# Altium PCB WorldClock.PcbDoc (part 12 of 13)
Units mil, origin at the board's own origin, x right, y up, seen from the top; angles counter-clockwise.
Board outline 3700 x 3850 mil, 2 copper layers (Top Layer, Bottom Layer); 227 components, 134 nets, 1324 pads, 248 vias.
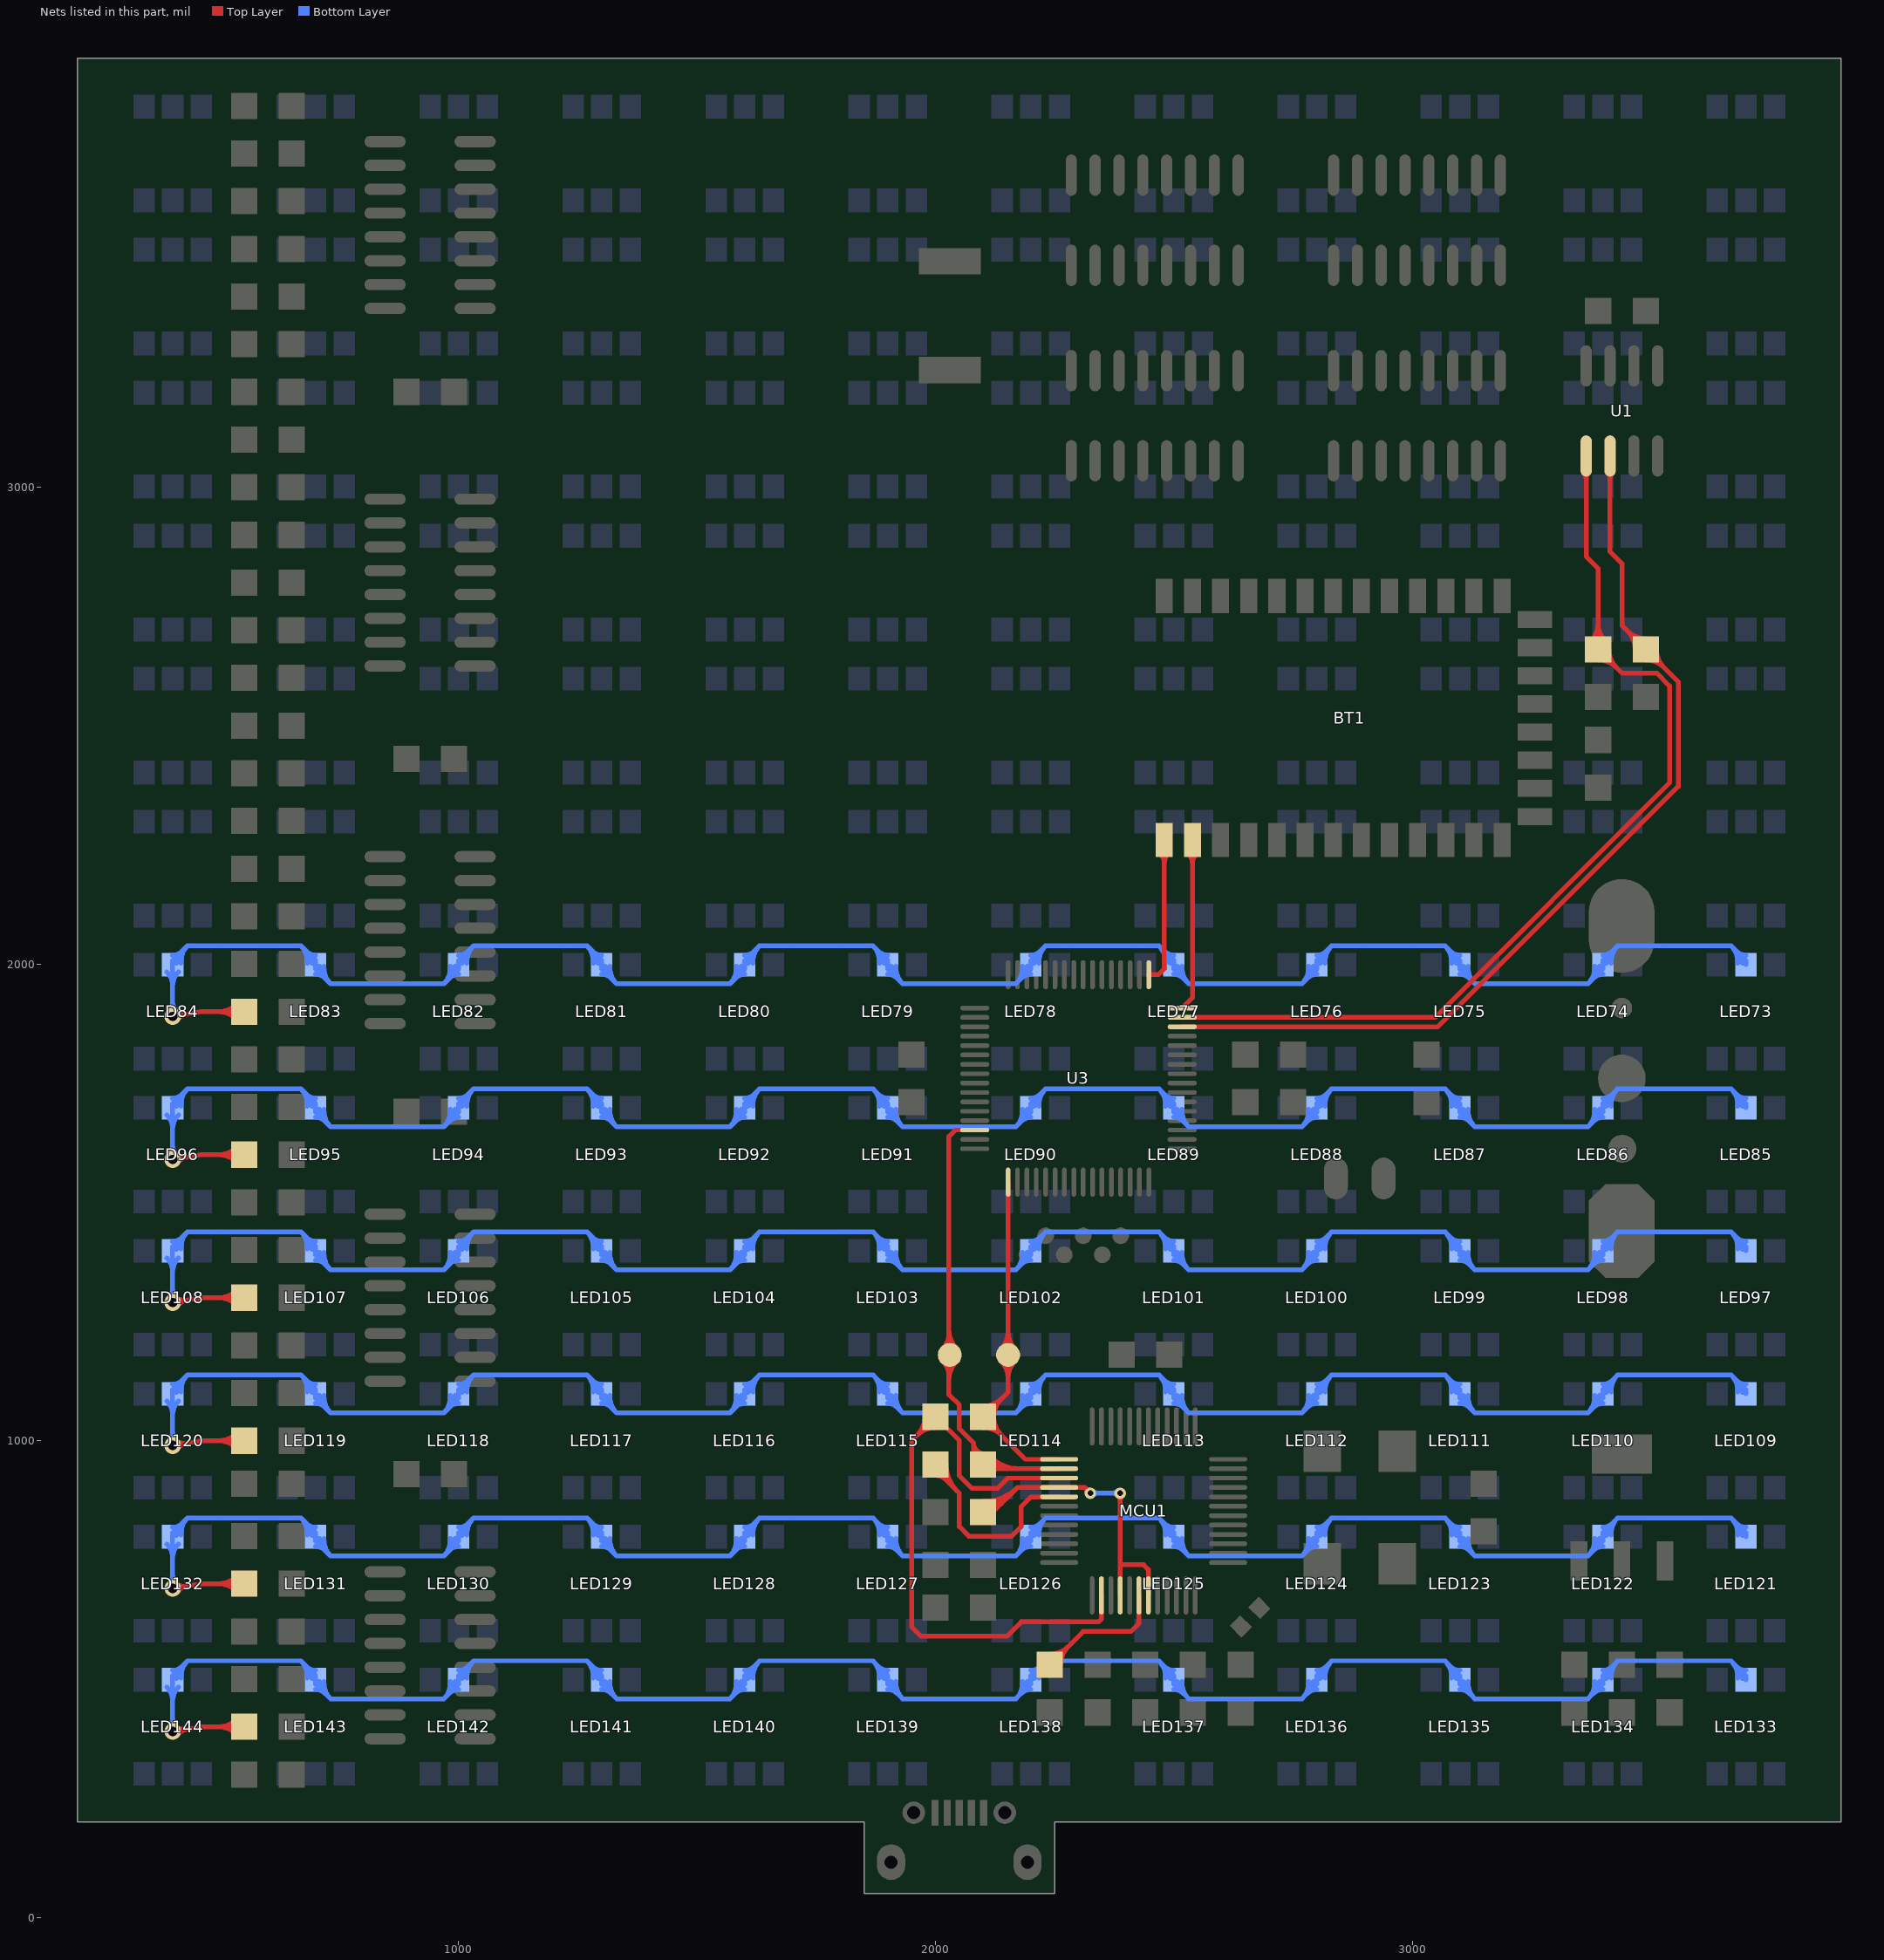
[diagram p12: the nets of this part, all layers, seen from the top]

## Via types
v1: diameter 35, hole 20, Top Layer to Bottom Layer, tented both sides, 213 vias
v2: diameter 24, hole 12, Top Layer to Bottom Layer, tented both sides, 35 vias

## Nets (pads, with @x,y where several pads share a name; then routed paths per layer and width w, separated by ;. In a path a pad name is that pad's centre, name@x,y a point inside that pad or via, vN(x,y) a via of type N, cw(c..) or ccw(c..) an arc to the next point about the centre after c; other vN are vias at no path point) (continued)
R7: LED73.2 LED74.2 LED75.2 LED76.2 LED77.2 LED78.2 LED79.2 LED80.2 LED81.2 LED82.2 LED83.2 LED84.2 R29.1 | length 6201.5
  Top Layer w10: v1(400,1890) 460,1900 R29.1@550,1900 ; v1@407.27,1900.17 ccw(c424.81,1924.73) 429.77,1894.96 ccw(c434.73,1865.19) v1@410.17,1882.73 ; R29.1@534.09,1884.09 ccw(c495.68,1845.68) 495.68,1900 ccw(c495.68,1954.32) R29.1@534.09,1915.91 ; R29.1@541.16,1891.16 ccw(c519.82,1869.82) 519.82,1900 ccw(c519.82,1930.18) R29.1@541.16,1908.84
  Bottom Layer w10: LED84.2@387.63,1983.55 cw(c357.75,1953.68) 400,1953.68 cw(c442.25,1953.68) LED84.2@412.37,1983.55 ; v1@391.16,1898.84 ccw(c369.82,1920.18) 400,1920.18 ccw(c430.18,1920.18) v1@408.84,1898.84 ; v1(400,1890) LED84.2@400,1998.43 400,2007.14 431.29,2038.43 668.71,2038.43 700,2007.14 LED83.2@700,1998.43 700,1989.71 731.29,1958.43 ; LED84.2@400,2018.43 ccw(c400,2045.67) 419.27,2026.41 ; LED84.2@407.49,2001.38 cw(c435.23,2003.06) LED84.2@415.58,2022.71 ; LED84.2@417.47,2001.98 cw(c464.85,2004.86) 431.28,2038.42 ; 668.72,2038.42 cw(c635.15,2004.86) LED83.2@682.53,2001.98 ; 680.73,2026.41 ccw(c700,2045.67) LED83.2@700,2018.43 ; LED83.2@684.42,2022.71 cw(c664.77,2003.06) LED83.2@692.51,2001.38 ; LED83.2@700,1978.43 cw(c700,1951.18) 719.27,1970.44 ; LED83.2@707.49,1995.47 ccw(c735.23,1993.79) LED83.2@715.58,1974.14 ; LED83.2@717.47,1994.87 ccw(c764.85,1991.99) 731.28,1958.43 ; 980.73,1970.44 cw(c1000,1951.18) LED82.2@1000,1978.43 ; LED82.2@982.53,1994.87 cw(c935.15,1991.99) 968.72,1958.43 ; LED82.2@984.42,1974.14 ccw(c964.77,1993.79) LED82.2@992.51,1995.47 ; LED82.2@1000,2018.43 ccw(c1000,2045.67) 1019.27,2026.41 ; LED82.2@1007.49,2001.38 cw(c1035.23,2003.06) LED82.2@1015.58,2022.71 ; LED82.2@1017.47,2001.98 cw(c1064.85,2004.86) 1031.28,2038.42 ; 1268.72,2038.42 cw(c1235.15,2004.86) LED81.2@1282.53,2001.98 ; 1280.73,2026.41 ccw(c1300,2045.67) LED81.2@1300,2018.43 ; LED81.2@1284.42,2022.71 cw(c1264.77,2003.06) LED81.2@1292.51,2001.38 ; LED81.2@1300,1978.43 cw(c1300,1951.18) 1319.27,1970.44 ; LED81.2@1307.49,1995.47 ccw(c1335.23,1993.79) LED81.2@1315.58,1974.14 ; LED81.2@1317.47,1994.87 ccw(c1364.85,1991.99) 1331.28,1958.43 ; 1580.73,1970.44 cw(c1600,1951.18) LED80.2@1600,1978.43 ; LED80.2@1582.53,1994.87 cw(c1535.15,1991.99) 1568.72,1958.43 ; LED80.2@1584.42,1974.14 ccw(c1564.77,1993.79) LED80.2@1592.51,1995.47 ; LED80.2@1600,2018.43 ccw(c1600,2045.67) 1619.27,2026.41 ; LED80.2@1607.49,2001.38 cw(c1635.23,2003.06) LED80.2@1615.58,2022.71 ; LED80.2@1617.47,2001.98 cw(c1664.85,2004.86) 1631.28,2038.42 ; 1868.72,2038.42 cw(c1835.15,2004.86) LED79.2@1882.53,2001.98 ; 1880.73,2026.41 ccw(c1900,2045.67) LED79.2@1900,2018.43 ; LED79.2@1884.42,2022.71 cw(c1864.77,2003.06) LED79.2@1892.51,2001.38 ; LED79.2@1900,1978.43 cw(c1900,1951.18) 1919.27,1970.44 ; LED79.2@1907.49,1995.47 ccw(c1935.23,1993.79) LED79.2@1915.58,1974.14 ; LED79.2@1917.47,1994.87 ccw(c1964.85,1991.99) 1931.28,1958.43 ; 2180.73,1970.44 cw(c2200,1951.18) LED78.2@2200,1978.43 ; LED78.2@2182.53,1994.87 cw(c2135.15,1991.99) 2168.72,1958.43 ; LED78.2@2184.42,1974.14 ccw(c2164.77,1993.79) LED78.2@2192.51,1995.47 ; LED78.2@2200,2018.43 ccw(c2200,2045.67) 2219.27,2026.41 ; LED78.2@2207.49,2001.38 cw(c2235.23,2003.06) LED78.2@2215.58,2022.71 ; LED78.2@2217.47,2001.98 cw(c2264.85,2004.86) 2231.28,2038.42 ; 2468.72,2038.42 cw(c2435.15,2004.86) LED77.2@2482.53,2001.98 ; 2480.73,2026.41 ccw(c2500,2045.67) LED77.2@2500,2018.43 ; LED77.2@2484.42,2022.71 cw(c2464.77,2003.06) LED77.2@2492.51,2001.38 ; LED77.2@2500,1978.43 cw(c2500,1951.18) 2519.27,1970.44 ; LED77.2@2507.49,1995.47 ccw(c2535.23,1993.79) LED77.2@2515.58,1974.14 ; LED77.2@2517.47,1994.87 ccw(c2564.85,1991.99) 2531.28,1958.43 ; 2780.73,1970.44 cw(c2800,1951.18) LED76.2@2800,1978.43 ; LED76.2@2782.53,1994.87 cw(c2735.15,1991.99) 2768.72,1958.43 ; LED76.2@2784.42,1974.14 ccw(c2764.77,1993.79) LED76.2@2792.51,1995.47 ; LED76.2@2800,2018.43 ccw(c2800,2045.67) 2819.27,2026.41 ; LED76.2@2807.49,2001.38 cw(c2835.23,2003.06) LED76.2@2815.58,2022.71 ; LED76.2@2817.47,2001.98 cw(c2864.85,2004.86) 2831.28,2038.42 ; 3068.72,2038.42 cw(c3035.15,2004.86) LED75.2@3082.53,2001.98 ; 3080.73,2026.41 ccw(c3100,2045.67) LED75.2@3100,2018.43 ; LED75.2@3084.42,2022.71 cw(c3064.77,2003.06) LED75.2@3092.51,2001.38 ; LED75.2@3100,1978.43 cw(c3100,1951.18) 3119.27,1970.44 ; LED75.2@3107.49,1995.47 ccw(c3135.23,1993.79) LED75.2@3115.58,1974.14 ; LED75.2@3117.47,1994.87 ccw(c3164.85,1991.99) 3131.28,1958.43 ; 3380.73,1970.44 cw(c3400,1951.18) LED74.2@3400,1978.43 ; LED74.2@3382.53,1994.87 cw(c3335.15,1991.99) 3368.72,1958.43 ; LED74.2@3384.42,1974.14 ccw(c3364.77,1993.79) LED74.2@3392.51,1995.47 ; LED74.2@3400,2018.43 ccw(c3400,2045.67) 3419.27,2026.41 ; LED74.2@3407.49,2001.38 cw(c3435.23,2003.06) LED74.2@3415.58,2022.71 ; LED74.2@3417.47,2001.98 cw(c3464.85,2004.86) 3431.28,2038.42 ; 3668.72,2038.42 cw(c3635.15,2004.86) LED73.2@3682.53,2001.98 ; 3680.73,2026.41 ccw(c3700,2045.67) LED73.2@3700,2018.43 ; LED73.2@3684.42,2022.71 cw(c3664.77,2003.06) LED73.2@3692.51,2001.38 ; LED73.2@3700,1998.43 3700,2007.14 3668.71,2038.43 3431.29,2038.43 3400,2007.14 LED74.2@3400,1998.43 3400,1989.71 3368.71,1958.43 ; 731.29,1958.43 968.71,1958.43 ; 968.71,1958.43 1000,1989.71 LED82.2@1000,1998.43 1000,2007.14 1031.29,2038.43 1268.71,2038.43 1300,2007.14 LED81.2@1300,1998.43 1300,1989.71 1331.29,1958.43 ; 1331.29,1958.43 1568.71,1958.43 ; 1568.71,1958.43 1600,1989.71 LED80.2@1600,1998.43 1600,2007.14 1631.29,2038.43 1868.71,2038.43 1900,2007.14 LED79.2@1900,1998.43 1900,1989.71 1931.29,1958.43 ; 1931.29,1958.43 2168.71,1958.43 ; 2168.71,1958.43 2200,1989.71 LED78.2@2200,1998.43 2200,2007.14 2231.29,2038.43 2468.71,2038.43 2500,2007.14 LED77.2@2500,1998.43 2500,1989.71 2531.29,1958.43 ; 2531.29,1958.43 2768.71,1958.43 ; 2768.71,1958.43 2800,1989.71 LED76.2@2800,1998.43 2800,2007.14 2831.29,2038.43 3068.71,2038.43 3100,2007.14 LED75.2@3100,1998.43 3100,1989.71 3131.29,1958.43 ; 3131.29,1958.43 3368.71,1958.43
R8: LED85.2 LED86.2 LED87.2 LED88.2 LED89.2 LED90.2 LED91.2 LED92.2 LED93.2 LED94.2 LED95.2 LED96.2 R32.1 | length 6201.5
  Top Layer w10: v1(400,1590) 460,1600 R32.1@550,1600 ; v1@407.27,1600.17 ccw(c424.81,1624.73) 429.77,1594.96 ccw(c434.73,1565.19) v1@410.17,1582.73 ; R32.1@534.09,1584.09 ccw(c495.68,1545.68) 495.68,1600 ccw(c495.68,1654.32) R32.1@534.09,1615.91 ; R32.1@541.16,1591.16 ccw(c519.82,1569.82) 519.82,1600 ccw(c519.82,1630.18) R32.1@541.16,1608.84
  Bottom Layer w10: LED96.2@387.63,1683.55 cw(c357.75,1653.68) 400,1653.68 cw(c442.25,1653.68) LED96.2@412.37,1683.55 ; v1@391.16,1598.84 ccw(c369.82,1620.18) 400,1620.18 ccw(c430.18,1620.18) v1@408.84,1598.84 ; v1(400,1590) LED96.2@400,1698.43 400,1707.14 431.29,1738.43 668.71,1738.43 700,1707.14 LED95.2@700,1698.43 700,1689.71 731.29,1658.43 ; LED96.2@400,1718.43 ccw(c400,1745.67) 419.27,1726.41 ; LED96.2@407.49,1701.38 cw(c435.23,1703.06) LED96.2@415.58,1722.71 ; LED96.2@417.47,1701.98 cw(c464.85,1704.86) 431.28,1738.42 ; 668.72,1738.42 cw(c635.15,1704.86) LED95.2@682.53,1701.98 ; 680.73,1726.41 ccw(c700,1745.67) LED95.2@700,1718.43 ; LED95.2@684.42,1722.71 cw(c664.77,1703.06) LED95.2@692.51,1701.38 ; LED95.2@700,1678.43 cw(c700,1651.18) 719.27,1670.44 ; LED95.2@707.49,1695.47 ccw(c735.23,1693.79) LED95.2@715.58,1674.14 ; LED95.2@717.47,1694.87 ccw(c764.85,1691.99) 731.28,1658.43 ; 980.73,1670.44 cw(c1000,1651.18) LED94.2@1000,1678.43 ; LED94.2@982.53,1694.87 cw(c935.15,1691.99) 968.72,1658.43 ; LED94.2@984.42,1674.14 ccw(c964.77,1693.79) LED94.2@992.51,1695.47 ; LED94.2@1000,1718.43 ccw(c1000,1745.67) 1019.27,1726.41 ; LED94.2@1007.49,1701.38 cw(c1035.23,1703.06) LED94.2@1015.58,1722.71 ; LED94.2@1017.47,1701.98 cw(c1064.85,1704.86) 1031.28,1738.42 ; 1268.72,1738.42 cw(c1235.15,1704.86) LED93.2@1282.53,1701.98 ; 1280.73,1726.41 ccw(c1300,1745.67) LED93.2@1300,1718.43 ; LED93.2@1284.42,1722.71 cw(c1264.77,1703.06) LED93.2@1292.51,1701.38 ; LED93.2@1300,1678.43 cw(c1300,1651.18) 1319.27,1670.44 ; LED93.2@1307.49,1695.47 ccw(c1335.23,1693.79) LED93.2@1315.58,1674.14 ; LED93.2@1317.47,1694.87 ccw(c1364.85,1691.99) 1331.28,1658.43 ; 1580.73,1670.44 cw(c1600,1651.18) LED92.2@1600,1678.43 ; LED92.2@1582.53,1694.87 cw(c1535.15,1691.99) 1568.72,1658.43 ; LED92.2@1584.42,1674.14 ccw(c1564.77,1693.79) LED92.2@1592.51,1695.47 ; LED92.2@1600,1718.43 ccw(c1600,1745.67) 1619.27,1726.41 ; LED92.2@1607.49,1701.38 cw(c1635.23,1703.06) LED92.2@1615.58,1722.71 ; LED92.2@1617.47,1701.98 cw(c1664.85,1704.86) 1631.28,1738.42 ; 1868.72,1738.42 cw(c1835.15,1704.86) LED91.2@1882.53,1701.98 ; 1880.73,1726.41 ccw(c1900,1745.67) LED91.2@1900,1718.43 ; LED91.2@1884.42,1722.71 cw(c1864.77,1703.06) LED91.2@1892.51,1701.38 ; LED91.2@1900,1678.43 cw(c1900,1651.18) 1919.27,1670.44 ; LED91.2@1907.49,1695.47 ccw(c1935.23,1693.79) LED91.2@1915.58,1674.14 ; LED91.2@1917.47,1694.87 ccw(c1964.85,1691.99) 1931.28,1658.43 ; 2180.73,1670.44 cw(c2200,1651.18) LED90.2@2200,1678.43 ; LED90.2@2182.53,1694.87 cw(c2135.15,1691.99) 2168.72,1658.43 ; LED90.2@2184.42,1674.14 ccw(c2164.77,1693.79) LED90.2@2192.51,1695.47 ; LED90.2@2200,1718.43 ccw(c2200,1745.67) 2219.27,1726.41 ; LED90.2@2207.49,1701.38 cw(c2235.23,1703.06) LED90.2@2215.58,1722.71 ; LED90.2@2217.47,1701.98 cw(c2264.85,1704.86) 2231.28,1738.42 ; 2468.72,1738.42 cw(c2435.15,1704.86) LED89.2@2482.53,1701.98 ; 2480.73,1726.41 ccw(c2500,1745.67) LED89.2@2500,1718.43 ; LED89.2@2484.42,1722.71 cw(c2464.77,1703.06) LED89.2@2492.51,1701.38 ; LED89.2@2500,1678.43 cw(c2500,1651.18) 2519.27,1670.44 ; LED89.2@2507.49,1695.47 ccw(c2535.23,1693.79) LED89.2@2515.58,1674.14 ; LED89.2@2517.47,1694.87 ccw(c2564.85,1691.99) 2531.28,1658.43 ; 2780.73,1670.44 cw(c2800,1651.18) LED88.2@2800,1678.43 ; LED88.2@2782.53,1694.87 cw(c2735.15,1691.99) 2768.72,1658.43 ; LED88.2@2784.42,1674.14 ccw(c2764.77,1693.79) LED88.2@2792.51,1695.47 ; LED88.2@2800,1718.43 ccw(c2800,1745.67) 2819.27,1726.41 ; LED88.2@2807.49,1701.38 cw(c2835.23,1703.06) LED88.2@2815.58,1722.71 ; LED88.2@2817.47,1701.98 cw(c2864.85,1704.86) 2831.28,1738.42 ; 3068.72,1738.42 cw(c3035.15,1704.86) LED87.2@3082.53,1701.98 ; 3080.73,1726.41 ccw(c3100,1745.67) LED87.2@3100,1718.43 ; LED87.2@3084.42,1722.71 cw(c3064.77,1703.06) LED87.2@3092.51,1701.38 ; LED87.2@3100,1678.43 cw(c3100,1651.18) 3119.27,1670.44 ; LED87.2@3107.49,1695.47 ccw(c3135.23,1693.79) LED87.2@3115.58,1674.14 ; LED87.2@3117.47,1694.87 ccw(c3164.85,1691.99) 3131.28,1658.43 ; 3380.73,1670.44 cw(c3400,1651.18) LED86.2@3400,1678.43 ; LED86.2@3382.53,1694.87 cw(c3335.15,1691.99) 3368.72,1658.43 ; LED86.2@3384.42,1674.14 ccw(c3364.77,1693.79) LED86.2@3392.51,1695.47 ; LED86.2@3400,1718.43 ccw(c3400,1745.67) 3419.27,1726.41 ; LED86.2@3407.49,1701.38 cw(c3435.23,1703.06) LED86.2@3415.58,1722.71 ; LED86.2@3417.47,1701.98 cw(c3464.85,1704.86) 3431.28,1738.42 ; 3668.72,1738.42 cw(c3635.15,1704.86) LED85.2@3682.53,1701.98 ; 3680.73,1726.41 ccw(c3700,1745.67) LED85.2@3700,1718.43 ; LED85.2@3684.42,1722.71 cw(c3664.77,1703.06) LED85.2@3692.51,1701.38 ; LED85.2@3700,1698.43 3700,1707.14 3668.71,1738.43 3431.29,1738.43 3400,1707.14 LED86.2@3400,1698.43 3400,1689.71 3368.71,1658.43 ; 731.29,1658.43 968.71,1658.43 ; 968.71,1658.43 1000,1689.71 LED94.2@1000,1698.43 1000,1707.14 1031.29,1738.43 1268.71,1738.43 1300,1707.14 LED93.2@1300,1698.43 1300,1689.71 1331.29,1658.43 ; 1331.29,1658.43 1568.71,1658.43 ; 1568.71,1658.43 1600,1689.71 LED92.2@1600,1698.43 1600,1707.14 1631.29,1738.43 1868.71,1738.43 1900,1707.14 LED91.2@1900,1698.43 1900,1689.71 1931.29,1658.43 ; 1931.29,1658.43 2168.71,1658.43 ; 2168.71,1658.43 2200,1689.71 LED90.2@2200,1698.43 2200,1707.14 2231.29,1738.43 2468.71,1738.43 2500,1707.14 LED89.2@2500,1698.43 2500,1689.71 2531.29,1658.43 ; 2531.29,1658.43 2768.71,1658.43 ; 2768.71,1658.43 2800,1689.71 LED88.2@2800,1698.43 2800,1707.14 2831.29,1738.43 3068.71,1738.43 3100,1707.14 LED87.2@3100,1698.43 3100,1689.71 3131.29,1658.43 ; 3131.29,1658.43 3368.71,1658.43
R9: LED97.2 LED98.2 LED99.2 LED100.2 LED101.2 LED102.2 LED103.2 LED104.2 LED105.2 LED106.2 LED107.2 LED108.2 R34.1 | length 6201.5
  Top Layer w10: v1(400,1290) 460,1300 R34.1@550,1300 ; v1@407.27,1300.17 ccw(c424.81,1324.73) 429.77,1294.96 ccw(c434.73,1265.19) v1@410.17,1282.73 ; R34.1@534.09,1284.09 ccw(c495.68,1245.68) 495.68,1300 ccw(c495.68,1354.32) R34.1@534.09,1315.91 ; R34.1@541.16,1291.16 ccw(c519.82,1269.82) 519.82,1300 ccw(c519.82,1330.18) R34.1@541.16,1308.84
  Bottom Layer w10: LED108.2@387.63,1383.55 cw(c357.75,1353.68) 400,1353.68 cw(c442.25,1353.68) LED108.2@412.37,1383.55 ; v1@391.16,1298.84 ccw(c369.82,1320.18) 400,1320.18 ccw(c430.18,1320.18) v1@408.84,1298.84 ; v1(400,1290) LED108.2@400,1398.43 400,1407.14 431.29,1438.43 668.71,1438.43 700,1407.14 LED107.2@700,1398.43 700,1389.71 731.29,1358.43 ; LED108.2@400,1418.43 ccw(c400,1445.67) 419.27,1426.41 ; LED108.2@407.49,1401.38 cw(c435.23,1403.06) LED108.2@415.58,1422.71 ; LED108.2@417.47,1401.98 cw(c464.85,1404.86) 431.28,1438.42 ; 668.72,1438.42 cw(c635.15,1404.86) LED107.2@682.53,1401.98 ; 680.73,1426.41 ccw(c700,1445.67) LED107.2@700,1418.43 ; LED107.2@684.42,1422.71 cw(c664.77,1403.06) LED107.2@692.51,1401.38 ; LED107.2@700,1378.43 cw(c700,1351.18) 719.27,1370.44 ; LED107.2@707.49,1395.47 ccw(c735.23,1393.79) LED107.2@715.58,1374.14 ; LED107.2@717.47,1394.87 ccw(c764.85,1391.99) 731.28,1358.43 ; 980.73,1370.44 cw(c1000,1351.18) LED106.2@1000,1378.43 ; LED106.2@982.53,1394.87 cw(c935.15,1391.99) 968.72,1358.43 ; LED106.2@984.42,1374.14 ccw(c964.77,1393.79) LED106.2@992.51,1395.47 ; LED106.2@1000,1418.43 ccw(c1000,1445.67) 1019.27,1426.41 ; LED106.2@1007.49,1401.38 cw(c1035.23,1403.06) LED106.2@1015.58,1422.71 ; LED106.2@1017.47,1401.98 cw(c1064.85,1404.86) 1031.28,1438.42 ; 1268.72,1438.42 cw(c1235.15,1404.86) LED105.2@1282.53,1401.98 ; 1280.73,1426.41 ccw(c1300,1445.67) LED105.2@1300,1418.43 ; LED105.2@1284.42,1422.71 cw(c1264.77,1403.06) LED105.2@1292.51,1401.38 ; LED105.2@1300,1378.43 cw(c1300,1351.18) 1319.27,1370.44 ; LED105.2@1307.49,1395.47 ccw(c1335.23,1393.79) LED105.2@1315.58,1374.14 ; LED105.2@1317.47,1394.87 ccw(c1364.85,1391.99) 1331.28,1358.43 ; 1580.73,1370.44 cw(c1600,1351.18) LED104.2@1600,1378.43 ; LED104.2@1582.53,1394.87 cw(c1535.15,1391.99) 1568.72,1358.43 ; LED104.2@1584.42,1374.14 ccw(c1564.77,1393.79) LED104.2@1592.51,1395.47 ; LED104.2@1600,1418.43 ccw(c1600,1445.67) 1619.27,1426.41 ; LED104.2@1607.49,1401.38 cw(c1635.23,1403.06) LED104.2@1615.58,1422.71 ; LED104.2@1617.47,1401.98 cw(c1664.85,1404.86) 1631.28,1438.42 ; 1868.72,1438.42 cw(c1835.15,1404.86) LED103.2@1882.53,1401.98 ; 1880.73,1426.41 ccw(c1900,1445.67) LED103.2@1900,1418.43 ; LED103.2@1884.42,1422.71 cw(c1864.77,1403.06) LED103.2@1892.51,1401.38 ; LED103.2@1900,1378.43 cw(c1900,1351.18) 1919.27,1370.44 ; LED103.2@1907.49,1395.47 ccw(c1935.23,1393.79) LED103.2@1915.58,1374.14 ; LED103.2@1917.47,1394.87 ccw(c1964.85,1391.99) 1931.28,1358.43 ; 2180.73,1370.44 cw(c2200,1351.18) LED102.2@2200,1378.43 ; LED102.2@2182.53,1394.87 cw(c2135.15,1391.99) 2168.72,1358.43 ; LED102.2@2184.42,1374.14 ccw(c2164.77,1393.79) LED102.2@2192.51,1395.47 ; LED102.2@2200,1418.43 ccw(c2200,1445.67) 2219.27,1426.41 ; LED102.2@2207.49,1401.38 cw(c2235.23,1403.06) LED102.2@2215.58,1422.71 ; LED102.2@2217.47,1401.98 cw(c2264.85,1404.86) 2231.28,1438.42 ; 2468.72,1438.42 cw(c2435.15,1404.86) LED101.2@2482.53,1401.98 ; 2480.73,1426.41 ccw(c2500,1445.67) LED101.2@2500,1418.43 ; LED101.2@2484.42,1422.71 cw(c2464.77,1403.06) LED101.2@2492.51,1401.38 ; LED101.2@2500,1378.43 cw(c2500,1351.18) 2519.27,1370.44 ; LED101.2@2507.49,1395.47 ccw(c2535.23,1393.79) LED101.2@2515.58,1374.14 ; LED101.2@2517.47,1394.87 ccw(c2564.85,1391.99) 2531.28,1358.43 ; 2780.73,1370.44 cw(c2800,1351.18) LED100.2@2800,1378.43 ; LED100.2@2782.53,1394.87 cw(c2735.15,1391.99) 2768.72,1358.43 ; LED100.2@2784.42,1374.14 ccw(c2764.77,1393.79) LED100.2@2792.51,1395.47 ; LED100.2@2800,1418.43 ccw(c2800,1445.67) 2819.27,1426.41 ; LED100.2@2807.49,1401.38 cw(c2835.23,1403.06) LED100.2@2815.58,1422.71 ; LED100.2@2817.47,1401.98 cw(c2864.85,1404.86) 2831.28,1438.42 ; 3068.72,1438.42 cw(c3035.15,1404.86) LED99.2@3082.53,1401.98 ; 3080.73,1426.41 ccw(c3100,1445.67) LED99.2@3100,1418.43 ; LED99.2@3084.42,1422.71 cw(c3064.77,1403.06) LED99.2@3092.51,1401.38 ; LED99.2@3100,1378.43 cw(c3100,1351.18) 3119.27,1370.44 ; LED99.2@3107.49,1395.47 ccw(c3135.23,1393.79) LED99.2@3115.58,1374.14 ; LED99.2@3117.47,1394.87 ccw(c3164.85,1391.99) 3131.28,1358.43 ; 3380.73,1370.44 cw(c3400,1351.18) LED98.2@3400,1378.43 ; LED98.2@3382.53,1394.87 cw(c3335.15,1391.99) 3368.72,1358.43 ; LED98.2@3384.42,1374.14 ccw(c3364.77,1393.79) LED98.2@3392.51,1395.47 ; LED98.2@3400,1418.43 ccw(c3400,1445.67) 3419.27,1426.41 ; LED98.2@3407.49,1401.38 cw(c3435.23,1403.06) LED98.2@3415.58,1422.71 ; LED98.2@3417.47,1401.98 cw(c3464.85,1404.86) 3431.28,1438.42 ; 3668.72,1438.42 cw(c3635.15,1404.86) LED97.2@3682.53,1401.98 ; 3680.73,1426.41 ccw(c3700,1445.67) LED97.2@3700,1418.43 ; LED97.2@3684.42,1422.71 cw(c3664.77,1403.06) LED97.2@3692.51,1401.38 ; LED97.2@3700,1398.43 3700,1407.14 3668.71,1438.43 3431.29,1438.43 3400,1407.14 LED98.2@3400,1398.43 3400,1389.71 3368.71,1358.43 ; 731.29,1358.43 968.71,1358.43 ; 968.71,1358.43 1000,1389.71 LED106.2@1000,1398.43 1000,1407.14 1031.29,1438.43 1268.71,1438.43 1300,1407.14 LED105.2@1300,1398.43 1300,1389.71 1331.29,1358.43 ; 1331.29,1358.43 1568.71,1358.43 ; 1568.71,1358.43 1600,1389.71 LED104.2@1600,1398.43 1600,1407.14 1631.29,1438.43 1868.71,1438.43 1900,1407.14 LED103.2@1900,1398.43 1900,1389.71 1931.29,1358.43 ; 1931.29,1358.43 2168.71,1358.43 ; 2168.71,1358.43 2200,1389.71 LED102.2@2200,1398.43 2200,1407.14 2231.29,1438.43 2468.71,1438.43 2500,1407.14 LED101.2@2500,1398.43 2500,1389.71 2531.29,1358.43 ; 2531.29,1358.43 2768.71,1358.43 ; 2768.71,1358.43 2800,1389.71 LED100.2@2800,1398.43 2800,1407.14 2831.29,1438.43 3068.71,1438.43 3100,1407.14 LED99.2@3100,1398.43 3100,1389.71 3131.29,1358.43 ; 3131.29,1358.43 3368.71,1358.43
R10: LED109.2 LED110.2 LED111.2 LED112.2 LED113.2 LED114.2 LED115.2 LED116.2 LED117.2 LED118.2 LED119.2 LED120.2 R38.1 | length 6201.5
  Top Layer w10: v1(400,990) 460,1000 R38.1@550,1000 ; v1@407.27,1000.17 ccw(c424.81,1024.73) 429.77,994.96 ccw(c434.73,965.19) v1@410.17,982.73 ; R38.1@534.09,984.09 ccw(c495.68,945.68) 495.68,1000 ccw(c495.68,1054.32) R38.1@534.09,1015.91 ; R38.1@541.16,991.16 ccw(c519.82,969.82) 519.82,1000 ccw(c519.82,1030.18) R38.1@541.16,1008.84
  Bottom Layer w10: LED120.2@387.63,1083.55 cw(c357.75,1053.68) 400,1053.68 cw(c442.25,1053.68) LED120.2@412.37,1083.55 ; v1@391.16,998.84 ccw(c369.82,1020.18) 400,1020.18 ccw(c430.18,1020.18) v1@408.84,998.84 ; v1(400,990) LED120.2@400,1098.43 400,1107.14 431.29,1138.43 668.71,1138.43 700,1107.14 LED119.2@700,1098.43 700,1089.71 731.29,1058.43 ; LED120.2@400,1118.43 ccw(c400,1145.67) 419.27,1126.41 ; LED120.2@407.49,1101.38 cw(c435.23,1103.06) LED120.2@415.58,1122.71 ; LED120.2@417.47,1101.98 cw(c464.85,1104.86) 431.28,1138.42 ; 668.72,1138.42 cw(c635.15,1104.86) LED119.2@682.53,1101.98 ; 680.73,1126.41 ccw(c700,1145.67) LED119.2@700,1118.43 ; LED119.2@684.42,1122.71 cw(c664.77,1103.06) LED119.2@692.51,1101.38 ; LED119.2@700,1078.43 cw(c700,1051.18) 719.27,1070.44 ; LED119.2@707.49,1095.47 ccw(c735.23,1093.79) LED119.2@715.58,1074.14 ; LED119.2@717.47,1094.87 ccw(c764.85,1091.99) 731.28,1058.43 ; 980.73,1070.44 cw(c1000,1051.18) LED118.2@1000,1078.43 ; LED118.2@982.53,1094.87 cw(c935.15,1091.99) 968.72,1058.43 ; LED118.2@984.42,1074.14 ccw(c964.77,1093.79) LED118.2@992.51,1095.47 ; LED118.2@1000,1118.43 ccw(c1000,1145.67) 1019.27,1126.41 ; LED118.2@1007.49,1101.38 cw(c1035.23,1103.06) LED118.2@1015.58,1122.71 ; LED118.2@1017.47,1101.98 cw(c1064.85,1104.86) 1031.28,1138.42 ; 1268.72,1138.42 cw(c1235.15,1104.86) LED117.2@1282.53,1101.98 ; 1280.73,1126.41 ccw(c1300,1145.67) LED117.2@1300,1118.43 ; LED117.2@1284.42,1122.71 cw(c1264.77,1103.06) LED117.2@1292.51,1101.38 ; LED117.2@1300,1078.43 cw(c1300,1051.18) 1319.27,1070.44 ; LED117.2@1307.49,1095.47 ccw(c1335.23,1093.79) LED117.2@1315.58,1074.14 ; LED117.2@1317.47,1094.87 ccw(c1364.85,1091.99) 1331.28,1058.43 ; 1580.73,1070.44 cw(c1600,1051.18) LED116.2@1600,1078.43 ; LED116.2@1582.53,1094.87 cw(c1535.15,1091.99) 1568.72,1058.43 ; LED116.2@1584.42,1074.14 ccw(c1564.77,1093.79) LED116.2@1592.51,1095.47 ; LED116.2@1600,1118.43 ccw(c1600,1145.67) 1619.27,1126.41 ; LED116.2@1607.49,1101.38 cw(c1635.23,1103.06) LED116.2@1615.58,1122.71 ; LED116.2@1617.47,1101.98 cw(c1664.85,1104.86) 1631.28,1138.42 ; 1868.72,1138.42 cw(c1835.15,1104.86) LED115.2@1882.53,1101.98 ; 1880.73,1126.41 ccw(c1900,1145.67) LED115.2@1900,1118.43 ; LED115.2@1884.42,1122.71 cw(c1864.77,1103.06) LED115.2@1892.51,1101.38 ; LED115.2@1900,1078.43 cw(c1900,1051.18) 1919.27,1070.44 ; LED115.2@1907.49,1095.47 ccw(c1935.23,1093.79) LED115.2@1915.58,1074.14 ; LED115.2@1917.47,1094.87 ccw(c1964.85,1091.99) 1931.28,1058.43 ; 2180.73,1070.44 cw(c2200,1051.18) LED114.2@2200,1078.43 ; LED114.2@2182.53,1094.87 cw(c2135.15,1091.99) 2168.72,1058.43 ; LED114.2@2184.42,1074.14 ccw(c2164.77,1093.79) LED114.2@2192.51,1095.47 ; LED114.2@2200,1118.43 ccw(c2200,1145.67) 2219.27,1126.41 ; LED114.2@2207.49,1101.38 cw(c2235.23,1103.06) LED114.2@2215.58,1122.71 ; LED114.2@2217.47,1101.98 cw(c2264.85,1104.86) 2231.28,1138.42 ; 2468.72,1138.42 cw(c2435.15,1104.86) LED113.2@2482.53,1101.98 ; 2480.73,1126.41 ccw(c2500,1145.67) LED113.2@2500,1118.43 ; LED113.2@2484.42,1122.71 cw(c2464.77,1103.06) LED113.2@2492.51,1101.38 ; LED113.2@2500,1078.43 cw(c2500,1051.18) 2519.27,1070.44 ; LED113.2@2507.49,1095.47 ccw(c2535.23,1093.79) LED113.2@2515.58,1074.14 ; LED113.2@2517.47,1094.87 ccw(c2564.85,1091.99) 2531.28,1058.43 ; 2780.73,1070.44 cw(c2800,1051.18) LED112.2@2800,1078.43 ; LED112.2@2782.53,1094.87 cw(c2735.15,1091.99) 2768.72,1058.43 ; LED112.2@2784.42,1074.14 ccw(c2764.77,1093.79) LED112.2@2792.51,1095.47 ; LED112.2@2800,1118.43 ccw(c2800,1145.67) 2819.27,1126.41 ; LED112.2@2807.49,1101.38 cw(c2835.23,1103.06) LED112.2@2815.58,1122.71 ; LED112.2@2817.47,1101.98 cw(c2864.85,1104.86) 2831.28,1138.42 ; 3068.72,1138.42 cw(c3035.15,1104.86) LED111.2@3082.53,1101.98 ; 3080.73,1126.41 ccw(c3100,1145.67) LED111.2@3100,1118.43 ; LED111.2@3084.42,1122.71 cw(c3064.77,1103.06) LED111.2@3092.51,1101.38 ; LED111.2@3100,1078.43 cw(c3100,1051.18) 3119.27,1070.44 ; LED111.2@3107.49,1095.47 ccw(c3135.23,1093.79) LED111.2@3115.58,1074.14 ; LED111.2@3117.47,1094.87 ccw(c3164.85,1091.99) 3131.28,1058.43 ; 3380.73,1070.44 cw(c3400,1051.18) LED110.2@3400,1078.43 ; LED110.2@3382.53,1094.87 cw(c3335.15,1091.99) 3368.72,1058.43 ; LED110.2@3384.42,1074.14 ccw(c3364.77,1093.79) LED110.2@3392.51,1095.47 ; LED110.2@3400,1118.43 ccw(c3400,1145.67) 3419.27,1126.41 ; LED110.2@3407.49,1101.38 cw(c3435.23,1103.06) LED110.2@3415.58,1122.71 ; LED110.2@3417.47,1101.98 cw(c3464.85,1104.86) 3431.28,1138.42 ; 3668.72,1138.42 cw(c3635.15,1104.86) LED109.2@3682.53,1101.98 ; 3680.73,1126.41 ccw(c3700,1145.67) LED109.2@3700,1118.43 ; LED109.2@3684.42,1122.71 cw(c3664.77,1103.06) LED109.2@3692.51,1101.38 ; LED109.2@3700,1098.43 3700,1107.14 3668.71,1138.43 3431.29,1138.43 3400,1107.14 LED110.2@3400,1098.43 3400,1089.71 3368.71,1058.43 ; 731.29,1058.43 968.71,1058.43 ; 968.71,1058.43 1000,1089.71 LED118.2@1000,1098.43 1000,1107.14 1031.29,1138.43 1268.71,1138.43 1300,1107.14 LED117.2@1300,1098.43 1300,1089.71 1331.29,1058.43 ; 1331.29,1058.43 1568.71,1058.43 ; 1568.71,1058.43 1600,1089.71 LED116.2@1600,1098.43 1600,1107.14 1631.29,1138.43 1868.71,1138.43 1900,1107.14 LED115.2@1900,1098.43 1900,1089.71 1931.29,1058.43 ; 1931.29,1058.43 2168.71,1058.43 ; 2168.71,1058.43 2200,1089.71 LED114.2@2200,1098.43 2200,1107.14 2231.29,1138.43 2468.71,1138.43 2500,1107.14 LED113.2@2500,1098.43 2500,1089.71 2531.29,1058.43 ; 2531.29,1058.43 2768.71,1058.43 ; 2768.71,1058.43 2800,1089.71 LED112.2@2800,1098.43 2800,1107.14 2831.29,1138.43 3068.71,1138.43 3100,1107.14 LED111.2@3100,1098.43 3100,1089.71 3131.29,1058.43 ; 3131.29,1058.43 3368.71,1058.43
R11: LED121.2 LED122.2 LED123.2 LED124.2 LED125.2 LED126.2 LED127.2 LED128.2 LED129.2 LED130.2 LED131.2 LED132.2 R41.1 | length 6201.5
  Top Layer w10: v1(400,690) 460,700 R41.1@550,700 ; v1@407.27,700.17 ccw(c424.81,724.73) 429.77,694.96 ccw(c434.73,665.19) v1@410.17,682.73 ; R41.1@534.09,684.09 ccw(c495.68,645.68) 495.68,700 ccw(c495.68,754.32) R41.1@534.09,715.91 ; R41.1@541.16,691.16 ccw(c519.82,669.82) 519.82,700 ccw(c519.82,730.18) R41.1@541.16,708.84
  Bottom Layer w10: LED132.2@387.63,783.55 cw(c357.75,753.68) 400,753.68 cw(c442.25,753.68) LED132.2@412.37,783.55 ; v1@391.16,698.84 ccw(c369.82,720.18) 400,720.18 ccw(c430.18,720.18) v1@408.84,698.84 ; v1(400,690) LED132.2@400,798.43 400,807.14 431.29,838.43 668.71,838.43 700,807.14 LED131.2@700,798.43 700,789.71 731.29,758.43 ; LED132.2@400,818.43 ccw(c400,845.67) 419.27,826.41 ; LED132.2@407.49,801.38 cw(c435.23,803.06) LED132.2@415.58,822.71 ; LED132.2@417.47,801.98 cw(c464.85,804.86) 431.28,838.42 ; 668.72,838.42 cw(c635.15,804.86) LED131.2@682.53,801.98 ; 680.73,826.41 ccw(c700,845.67) LED131.2@700,818.43 ; LED131.2@684.42,822.71 cw(c664.77,803.06) LED131.2@692.51,801.38 ; LED131.2@700,778.43 cw(c700,751.18) 719.27,770.44 ; LED131.2@707.49,795.47 ccw(c735.23,793.79) LED131.2@715.58,774.14 ; LED131.2@717.47,794.87 ccw(c764.85,791.99) 731.28,758.43 ; 980.73,770.44 cw(c1000,751.18) LED130.2@1000,778.43 ; LED130.2@982.53,794.87 cw(c935.15,791.99) 968.72,758.43 ; LED130.2@984.42,774.14 ccw(c964.77,793.79) LED130.2@992.51,795.47 ; LED130.2@1000,818.43 ccw(c1000,845.67) 1019.27,826.41 ; LED130.2@1007.49,801.38 cw(c1035.23,803.06) LED130.2@1015.58,822.71 ; LED130.2@1017.47,801.98 cw(c1064.85,804.86) 1031.28,838.42 ; 1268.72,838.42 cw(c1235.15,804.86) LED129.2@1282.53,801.98 ; 1280.73,826.41 ccw(c1300,845.67) LED129.2@1300,818.43 ; LED129.2@1284.42,822.71 cw(c1264.77,803.06) LED129.2@1292.51,801.38 ; LED129.2@1300,778.43 cw(c1300,751.18) 1319.27,770.44 ; LED129.2@1307.49,795.47 ccw(c1335.23,793.79) LED129.2@1315.58,774.14 ; LED129.2@1317.47,794.87 ccw(c1364.85,791.99) 1331.28,758.43 ; 1580.73,770.44 cw(c1600,751.18) LED128.2@1600,778.43 ; LED128.2@1582.53,794.87 cw(c1535.15,791.99) 1568.72,758.43 ; LED128.2@1584.42,774.14 ccw(c1564.77,793.79) LED128.2@1592.51,795.47 ; LED128.2@1600,818.43 ccw(c1600,845.67) 1619.27,826.41 ; LED128.2@1607.49,801.38 cw(c1635.23,803.06) LED128.2@1615.58,822.71 ; LED128.2@1617.47,801.98 cw(c1664.85,804.86) 1631.28,838.42 ; 1868.72,838.42 cw(c1835.15,804.86) LED127.2@1882.53,801.98 ; 1880.73,826.41 ccw(c1900,845.67) LED127.2@1900,818.43 ; LED127.2@1884.42,822.71 cw(c1864.77,803.06) LED127.2@1892.51,801.38 ; LED127.2@1900,778.43 cw(c1900,751.18) 1919.27,770.44 ; LED127.2@1907.49,795.47 ccw(c1935.23,793.79) LED127.2@1915.58,774.14 ; LED127.2@1917.47,794.87 ccw(c1964.85,791.99) 1931.28,758.43 ; 2180.73,770.44 cw(c2200,751.18) LED126.2@2200,778.43 ; LED126.2@2182.53,794.87 cw(c2135.15,791.99) 2168.72,758.43 ; LED126.2@2184.42,774.14 ccw(c2164.77,793.79) LED126.2@2192.51,795.47 ; LED126.2@2200,818.43 ccw(c2200,845.67) 2219.27,826.41 ; LED126.2@2207.49,801.38 cw(c2235.23,803.06) LED126.2@2215.58,822.71 ; LED126.2@2217.47,801.98 cw(c2264.85,804.86) 2231.28,838.42 ; 2468.72,838.42 cw(c2435.15,804.86) LED125.2@2482.53,801.98 ; 2480.73,826.41 ccw(c2500,845.67) LED125.2@2500,818.43 ; LED125.2@2484.42,822.71 cw(c2464.77,803.06) LED125.2@2492.51,801.38 ; LED125.2@2500,778.43 cw(c2500,751.18) 2519.27,770.44 ; LED125.2@2507.49,795.47 ccw(c2535.23,793.79) LED125.2@2515.58,774.14 ; LED125.2@2517.47,794.87 ccw(c2564.85,791.99) 2531.28,758.43 ; 2780.73,770.44 cw(c2800,751.18) LED124.2@2800,778.43 ; LED124.2@2782.53,794.87 cw(c2735.15,791.99) 2768.72,758.43 ; LED124.2@2784.42,774.14 ccw(c2764.77,793.79) LED124.2@2792.51,795.47 ; LED124.2@2800,818.43 ccw(c2800,845.67) 2819.27,826.41 ; LED124.2@2807.49,801.38 cw(c2835.23,803.06) LED124.2@2815.58,822.71 ; LED124.2@2817.47,801.98 cw(c2864.85,804.86) 2831.28,838.42 ; 3068.72,838.42 cw(c3035.15,804.86) LED123.2@3082.53,801.98 ; 3080.73,826.41 ccw(c3100,845.67) LED123.2@3100,818.43 ; LED123.2@3084.42,822.71 cw(c3064.77,803.06) LED123.2@3092.51,801.38 ; LED123.2@3100,778.43 cw(c3100,751.18) 3119.27,770.44 ; LED123.2@3107.49,795.47 ccw(c3135.23,793.79) LED123.2@3115.58,774.14 ; LED123.2@3117.47,794.87 ccw(c3164.85,791.99) 3131.28,758.43 ; 3380.73,770.44 cw(c3400,751.18) LED122.2@3400,778.43 ; LED122.2@3382.53,794.87 cw(c3335.15,791.99) 3368.72,758.43 ; LED122.2@3384.42,774.14 ccw(c3364.77,793.79) LED122.2@3392.51,795.47 ; LED122.2@3400,818.43 ccw(c3400,845.67) 3419.27,826.41 ; LED122.2@3407.49,801.38 cw(c3435.23,803.06) LED122.2@3415.58,822.71 ; LED122.2@3417.47,801.98 cw(c3464.85,804.86) 3431.28,838.42 ; 3668.72,838.42 cw(c3635.15,804.86) LED121.2@3682.53,801.98 ; 3680.73,826.41 ccw(c3700,845.67) LED121.2@3700,818.43 ; LED121.2@3684.42,822.71 cw(c3664.77,803.06) LED121.2@3692.51,801.38 ; LED121.2@3700,798.43 3700,807.14 3668.71,838.43 3431.29,838.43 3400,807.14 LED122.2@3400,798.43 3400,789.71 3368.71,758.43 ; 731.29,758.43 968.71,758.43 ; 968.71,758.43 1000,789.71 LED130.2@1000,798.43 1000,807.14 1031.29,838.43 1268.71,838.43 1300,807.14 LED129.2@1300,798.43 1300,789.71 1331.29,758.43 ; 1331.29,758.43 1568.71,758.43 ; 1568.71,758.43 1600,789.71 LED128.2@1600,798.43 1600,807.14 1631.29,838.43 1868.71,838.43 1900,807.14 LED127.2@1900,798.43 1900,789.71 1931.29,758.43 ; 1931.29,758.43 2168.71,758.43 ; 2168.71,758.43 2200,789.71 LED126.2@2200,798.43 2200,807.14 2231.29,838.43 2468.71,838.43 2500,807.14 LED125.2@2500,798.43 2500,789.71 2531.29,758.43 ; 2531.29,758.43 2768.71,758.43 ; 2768.71,758.43 2800,789.71 LED124.2@2800,798.43 2800,807.14 2831.29,838.43 3068.71,838.43 3100,807.14 LED123.2@3100,798.43 3100,789.71 3131.29,758.43 ; 3131.29,758.43 3368.71,758.43
R12: LED133.2 LED134.2 LED135.2 LED136.2 LED137.2 LED138.2 LED139.2 LED140.2 LED141.2 LED142.2 LED143.2 LED144.2 R43.1 | length 6201.5
  Top Layer w10: v1(400,390) 460,400 R43.1@550,400 ; v1@407.27,400.17 ccw(c424.81,424.73) 429.77,394.96 ccw(c434.73,365.19) v1@410.17,382.73 ; R43.1@534.09,384.09 ccw(c495.68,345.68) 495.68,400 ccw(c495.68,454.32) R43.1@534.09,415.91 ; R43.1@541.16,391.16 ccw(c519.82,369.82) 519.82,400 ccw(c519.82,430.18) R43.1@541.16,408.84
  Bottom Layer w10: LED144.2@387.63,483.55 cw(c357.75,453.68) 400,453.68 cw(c442.25,453.68) LED144.2@412.37,483.55 ; v1@391.16,398.84 ccw(c369.82,420.18) 400,420.18 ccw(c430.18,420.18) v1@408.84,398.84 ; v1(400,390) LED144.2@400,498.43 400,507.14 431.29,538.43 668.71,538.43 700,507.14 LED143.2@700,498.43 700,489.71 731.29,458.43 ; LED144.2@400,518.43 ccw(c400,545.67) 419.27,526.41 ; LED144.2@407.49,501.38 cw(c435.23,503.06) LED144.2@415.58,522.71 ; LED144.2@417.47,501.98 cw(c464.85,504.86) 431.28,538.42 ; 668.72,538.42 cw(c635.15,504.86) LED143.2@682.53,501.98 ; 680.73,526.41 ccw(c700,545.67) LED143.2@700,518.43 ; LED143.2@684.42,522.71 cw(c664.77,503.06) LED143.2@692.51,501.38 ; LED143.2@700,478.43 cw(c700,451.18) 719.27,470.44 ; LED143.2@707.49,495.47 ccw(c735.23,493.79) LED143.2@715.58,474.14 ; LED143.2@717.47,494.87 ccw(c764.85,491.99) 731.28,458.43 ; 980.73,470.44 cw(c1000,451.18) LED142.2@1000,478.43 ; LED142.2@982.53,494.87 cw(c935.15,491.99) 968.72,458.43 ; LED142.2@984.42,474.14 ccw(c964.77,493.79) LED142.2@992.51,495.47 ; LED142.2@1000,518.43 ccw(c1000,545.67) 1019.27,526.41 ; LED142.2@1007.49,501.38 cw(c1035.23,503.06) LED142.2@1015.58,522.71 ; LED142.2@1017.47,501.98 cw(c1064.85,504.86) 1031.28,538.42 ; 1268.72,538.42 cw(c1235.15,504.86) LED141.2@1282.53,501.98 ; 1280.73,526.41 ccw(c1300,545.67) LED141.2@1300,518.43 ; LED141.2@1284.42,522.71 cw(c1264.77,503.06) LED141.2@1292.51,501.38 ; LED141.2@1300,478.43 cw(c1300,451.18) 1319.27,470.44 ; LED141.2@1307.49,495.47 ccw(c1335.23,493.79) LED141.2@1315.58,474.14 ; LED141.2@1317.47,494.87 ccw(c1364.85,491.99) 1331.28,458.43 ; 1580.73,470.44 cw(c1600,451.18) LED140.2@1600,478.43 ; LED140.2@1582.53,494.87 cw(c1535.15,491.99) 1568.72,458.43 ; LED140.2@1584.42,474.14 ccw(c1564.77,493.79) LED140.2@1592.51,495.47 ; LED140.2@1600,518.43 ccw(c1600,545.67) 1619.27,526.41 ; LED140.2@1607.49,501.38 cw(c1635.23,503.06) LED140.2@1615.58,522.71 ; LED140.2@1617.47,501.98 cw(c1664.85,504.86) 1631.28,538.42 ; 1868.72,538.42 cw(c1835.15,504.86) LED139.2@1882.53,501.98 ; 1880.73,526.41 ccw(c1900,545.67) LED139.2@1900,518.43 ; LED139.2@1884.42,522.71 cw(c1864.77,503.06) LED139.2@1892.51,501.38 ; LED139.2@1900,478.43 cw(c1900,451.18) 1919.27,470.44 ; LED139.2@1907.49,495.47 ccw(c1935.23,493.79) LED139.2@1915.58,474.14 ; LED139.2@1917.47,494.87 ccw(c1964.85,491.99) 1931.28,458.43 ; 2180.73,470.44 cw(c2200,451.18) LED138.2@2200,478.43 ; LED138.2@2182.53,494.87 cw(c2135.15,491.99) 2168.72,458.43 ; LED138.2@2184.42,474.14 ccw(c2164.77,493.79) LED138.2@2192.51,495.47 ; LED138.2@2200,518.43 ccw(c2200,545.67) 2219.27,526.41 ; LED138.2@2207.49,501.38 cw(c2235.23,503.06) LED138.2@2215.58,522.71 ; LED138.2@2217.47,501.98 cw(c2264.85,504.86) 2231.28,538.42 ; 2468.72,538.42 cw(c2435.15,504.86) LED137.2@2482.53,501.98 ; 2480.73,526.41 ccw(c2500,545.67) LED137.2@2500,518.43 ; LED137.2@2484.42,522.71 cw(c2464.77,503.06) LED137.2@2492.51,501.38 ; LED137.2@2500,478.43 cw(c2500,451.18) 2519.27,470.44 ; LED137.2@2507.49,495.47 ccw(c2535.23,493.79) LED137.2@2515.58,474.14 ; LED137.2@2517.47,494.87 ccw(c2564.85,491.99) 2531.28,458.43 ; 2780.73,470.44 cw(c2800,451.18) LED136.2@2800,478.43 ; LED136.2@2782.53,494.87 cw(c2735.15,491.99) 2768.72,458.43 ; LED136.2@2784.42,474.14 ccw(c2764.77,493.79) LED136.2@2792.51,495.47 ; LED136.2@2800,518.43 ccw(c2800,545.67) 2819.27,526.41 ; LED136.2@2807.49,501.38 cw(c2835.23,503.06) LED136.2@2815.58,522.71 ; LED136.2@2817.47,501.98 cw(c2864.85,504.86) 2831.28,538.42 ; 3068.72,538.42 cw(c3035.15,504.86) LED135.2@3082.53,501.98 ; 3080.73,526.41 ccw(c3100,545.67) LED135.2@3100,518.43 ; LED135.2@3084.42,522.71 cw(c3064.77,503.06) LED135.2@3092.51,501.38 ; LED135.2@3100,478.43 cw(c3100,451.18) 3119.27,470.44 ; LED135.2@3107.49,495.47 ccw(c3135.23,493.79) LED135.2@3115.58,474.14 ; LED135.2@3117.47,494.87 ccw(c3164.85,491.99) 3131.28,458.43 ; 3380.73,470.44 cw(c3400,451.18) LED134.2@3400,478.43 ; LED134.2@3382.53,494.87 cw(c3335.15,491.99) 3368.72,458.43 ; LED134.2@3384.42,474.14 ccw(c3364.77,493.79) LED134.2@3392.51,495.47 ; LED134.2@3400,518.43 ccw(c3400,545.67) 3419.27,526.41 ; LED134.2@3407.49,501.38 cw(c3435.23,503.06) LED134.2@3415.58,522.71 ; LED134.2@3417.47,501.98 cw(c3464.85,504.86) 3431.28,538.42 ; 3668.72,538.42 cw(c3635.15,504.86) LED133.2@3682.53,501.98 ; 3680.73,526.41 ccw(c3700,545.67) LED133.2@3700,518.43 ; LED133.2@3684.42,522.71 cw(c3664.77,503.06) LED133.2@3692.51,501.38 ; LED133.2@3700,498.43 3700,507.14 3668.71,538.43 3431.29,538.43 3400,507.14 LED134.2@3400,498.43 3400,489.71 3368.71,458.43 ; 731.29,458.43 968.71,458.43 ; 968.71,458.43 1000,489.71 LED142.2@1000,498.43 1000,507.14 1031.29,538.43 1268.71,538.43 1300,507.14 LED141.2@1300,498.43 1300,489.71 1331.29,458.43 ; 1331.29,458.43 1568.71,458.43 ; 1568.71,458.43 1600,489.71 LED140.2@1600,498.43 1600,507.14 1631.29,538.43 1868.71,538.43 1900,507.14 LED139.2@1900,498.43 1900,489.71 1931.29,458.43 ; 1931.29,458.43 2168.71,458.43 ; 2168.71,458.43 2200,489.71 LED138.2@2200,498.43 2200,507.14 2231.29,538.43 2468.71,538.43 2500,507.14 LED137.2@2500,498.43 2500,489.71 2531.29,458.43 ; 2531.29,458.43 2768.71,458.43 ; 2768.71,458.43 2800,489.71 LED136.2@2800,498.43 2800,507.14 2831.29,538.43 3068.71,538.43 3100,507.14 LED135.2@3100,498.43 3100,489.71 3131.29,458.43 ; 3131.29,458.43 3368.71,458.43
SCL: R1.2 U1.2 U3.14 | length 2292.8
  Top Layer w10: U3.14@2517.52,1868.27 3053.72,1868.27 3558,2372.54 3558,2592 R1.2@3490,2660 3440,2710 3440,2840 3415,2865 U1.2@3415,3065.51 ; U1.2@3410.18,3029.2 cw(c3398.56,3017.57) 3415,3017.57 cw(c3431.44,3017.57) U1.2@3419.82,3029.2 ; R1.2@3467.5,2660 ccw(c3413.18,2660) 3451.59,2698.41 ccw(c3490,2736.82) R1.2@3490,2682.5 ; R1.2@3477.5,2660 ccw(c3447.32,2660) 3468.66,2681.34 ccw(c3490,2702.68) R1.2@3490,2672.5 ; R1.2@3490,2637.5 cw(c3490,2583.18) 3528.41,2621.59 cw(c3566.82,2660) R1.2@3512.5,2660 ; R1.2@3490,2647.5 cw(c3490,2617.32) 3511.34,2638.66 cw(c3532.68,2660) R1.2@3502.5,2660
SDA: R2.2 U1.1 U3.15 | length 2318.6
  Top Layer w10: U3.15@2517.52,1887.95 3047.95,1887.95 3540,2380 3540,2583.38 3513.38,2610 3440,2610 R2.2@3390,2660 3390,2830 3365,2855 U1.1@3365,3065.51 ; U1.1@3360.18,3029.2 cw(c3348.56,3017.57) 3365,3017.57 cw(c3381.44,3017.57) U1.1@3369.82,3029.2 ; R2.2@3374.09,2675.91 ccw(c3335.68,2714.32) 3390,2714.32 ccw(c3444.32,2714.32) R2.2@3405.91,2675.91 ; R2.2@3381.16,2668.84 ccw(c3359.82,2690.18) 3390,2690.18 ccw(c3420.18,2690.18) R2.2@3398.84,2668.84 ; R2.2@3390,2637.5 cw(c3390,2583.18) 3428.41,2621.59 cw(c3466.82,2660) R2.2@3412.5,2660 ; R2.2@3390,2647.5 cw(c3390,2617.32) 3411.34,2638.66 cw(c3432.68,2660) R2.2@3402.5,2660
TCKIN: MCU1.13 pad.0@2152.36,1180 R4.1 U3.49 | length 1127.7
  Top Layer w10: R4.1@2100,1027.5 cw(c2100,973.18) 2138.41,1011.59 cw(c2176.82,1050) 2122.5,1050 cw(c2176.82,1050) 2138.41,1088.41 cw(c2100,1126.82) R4.1@2100,1072.5 ; R4.1@2100,1037.5 cw(c2100,1007.32) 2121.34,1028.66 cw(c2142.68,1050) 2112.5,1050 cw(c2142.68,1050) 2121.34,1071.34 cw(c2100,1092.68) R4.1@2100,1062.5 ; pad.0@2138.22,1165.86 cw(c2104.08,1131.72) 2152.36,1131.72 cw(c2200.65,1131.72) pad.0@2166.5,1165.86 ; pad.0@2138.22,1194.14 ccw(c2104.08,1228.28) 2152.36,1228.28 ccw(c2200.65,1228.28) pad.0@2166.5,1194.14 ; U3.49@2152.36,1542.48 2152.36,1102.36 2100,1050 2188.9,961.1 MCU1.13@2259.57,961.1
TCKOUT: MCU1.15 MCU1.26 R4.2 | length 1438.1
  Top Layer w10: R4.2@1977.5,1050 cw(c1923.18,1050) 1961.59,1011.59 cw(c2000,973.18) R4.2@2000,1027.5 ; R4.2@1987.5,1050 cw(c1957.32,1050) 1978.66,1028.66 cw(c2000,1007.32) R4.2@2000,1037.5 ; MCU1.15@2259.57,921.73 2151.73,921.73 2130,900 2076.62,900 2050,926.62 2050,1000 2000,1050 1950,1000 1950,610 1970,590 2150,590 2180,620 2342,620 2348.15,626.15 MCU1.26@2348.15,675.67
TDOIN: MCU1.16 MCU1.28 MCU1.31 R8.1 | length 935.4
  Top Layer w10: R8.1@2100,850 2120,850 2172.05,902.05 ; R8.1@2100.01,852.5 ccw(c2100.32,906.04) 2138.18,868.18 ; R8.1@2100.07,862.5 ccw(c2100.52,939.71) 2155.11,885.11 ; R8.1@2100.13,872.5 ccw(c2100.71,973.38) 2172.04,902.04 ; v2@2318,890 ccw(c2301.1,890) 2313.05,901.95 ccw(c2325,913.9) v2@2325,897 ; v2(2325,890) 2312.95,902.05 MCU1.16@2259.57,902.05 2172.05,902.05 ; v2@2382.57,885.05 cw(c2370.62,873.1) 2387.52,873.1 cw(c2404.42,873.1) v2@2392.47,885.05 ; MCU1.28@2387.52,675.67 2387.52,740 ; v2(2387.52,890) 2387.52,740 ; MCU1.31@2446.57,675.67 2446.57,730 2436.57,740 2387.52,740
  Bottom Layer w10: v2(2325,890) v2(2387.52,890) ; v2@2329.95,885.05 cw(c2341.9,873.1) 2341.9,890 cw(c2341.9,906.9) v2@2329.95,894.95 ; v2@2382.57,885.05 ccw(c2370.62,873.1) 2370.62,890 ccw(c2370.62,906.9) v2@2382.57,894.95
TMSIN: MCU1.14 pad.0@2030,1180 R7.1 U3.46 | length 1400.4
  Top Layer w10: pad.0@2015.86,1165.86 cw(c1985.9,1135.9) 2028.27,1135.9 ; pad.0@2015.86,1194.14 ccw(c1985.9,1224.1) 2028.27,1224.1 ; 2028.27,1127.53 cw(c2082.47,1127.53) pad.0@2044.14,1165.86 ; 2028.27,1151.68 cw(c2058.32,1151.68) pad.0@2037.07,1172.93 ; 2028.27,1208.32 ccw(c2058.32,1208.32) pad.0@2037.07,1187.07 ; 2028.27,1232.47 ccw(c2082.47,1232.47) pad.0@2044.14,1194.14 ; R7.1@2080,974.06 ccw(c2101.62,974.06) R7.1@2100.17,952.49 ; 2080,984.76 ccw(c2102.34,984.76) R7.1@2100.84,962.47 ; U3.46@2082.48,1651.73 2041.73,1651.73 2028.27,1638.27 2028.27,1096.73 2050,1075 2050,1025.46 2080,995.46 ; R7.1@2101.51,972.45 cw(c2103.06,995.45) 2080,995.45 ; R7.1@2101.77,951.77 ccw(c2126.76,976.76) R7.1@2126.76,941.42 ; R7.1@2108.84,958.84 ccw(c2150.9,1000.9) 2150.9,941.42 ; R7.1@2115.91,934.09 cw(c2133.6,916.4) 2133.6,941.42 ; R7.1@2115.91,965.91 ccw(c2175.04,1025.04) 2175.04,941.42 ; MCU1.14@2259.57,941.42 2108.58,941.42 R7.1@2100,950 2080,970 2080,995.46
TMSOUT: MCU1.17 R7.2 | length 555.3
  Top Layer w10: R7.2@2000,927.5 cw(c2000,897.32) 2021.34,918.66 ; R7.2@2000,950 2000,940 2050,890 2050,820 2070,800 2160,800 2180,820 2180,862 2200.36,882.36 MCU1.17@2259.57,882.36 ; R7.2@2012.5,950 ccw(c2066.82,950) 2028.41,911.59 ; R7.2@2022.5,950 ccw(c2100.96,950) 2045.48,894.52
U1RX: BT1.1 U3.17 | length 356.8
  Top Layer w10: U3.17@2447.64,1977.52 2467.52,1977.52 2480,1990 BT1.1@2480,2260 ; BT1.1@2470.81,2232.81 cw(c2448.62,2210.62) 2480,2210.62 cw(c2511.38,2210.62) BT1.1@2489.19,2232.81
U1TX: BT1.2 U3.16 | length 410.6
  Top Layer w10: U3.16@2517.52,1907.64 2539.06,1929.17 BT1.2@2539.06,2260 ; BT1.2@2529.86,2232.81 cw(c2507.67,2210.62) 2539.06,2210.62 cw(c2570.44,2210.62) BT1.2@2548.25,2232.81
USBCK: MCU1.30 R6.2 | length 414.4
  Top Layer w10: R6.2@2240,530 2310,600 2410,600 2426.89,616.89 MCU1.30@2426.89,675.67 ; R6.2@2240,542.5 ccw(c2240,572.68) 2261.34,551.34 ccw(c2282.68,530) R6.2@2252.5,530 ; R6.2@2240,552.5 ccw(c2240,606.82) 2278.41,568.41 ccw(c2316.82,530) R6.2@2262.5,530